# Altium PCB PCB.PcbDoc
Units mm, origin at the board's own origin, x right, y up, seen from the top; angles counter-clockwise.
Board outline 10.67 x 10.41 mm, 2 copper layers (Top Layer, Bottom Layer); 22 components, 8 nets, 48 pads, 0 vias.
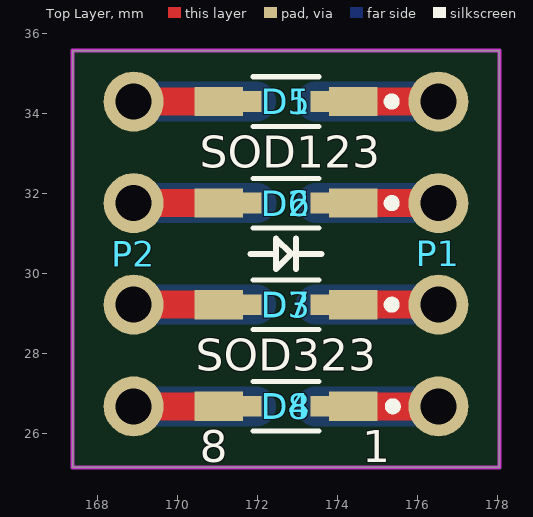
[diagram p0: Top Layer view]
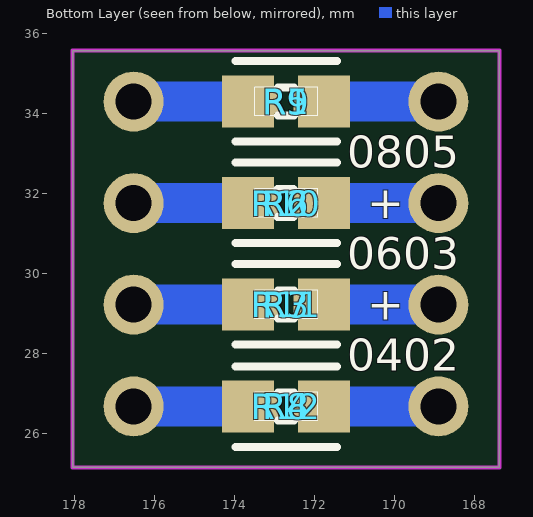
[diagram p1: Bottom Layer view, seen from below]

## Layer stack, top to bottom
Top Solder: solder mask 0.0102, Solder Resist, Dk 3.5
Top Layer: signal copper 0.0356
Dielectric 1: dielectric 0.32, FR-4, Dk 4.8
Bottom Layer: signal copper 0.0356
Bottom Solder: solder mask 0.0102, Solder Resist, Dk 3.5

## Board outline
167.386,35.56 178.054,35.56 178.054,25.146 167.386,25.146

## Design rules (kind name [scope] priority, off if disabled: settings)
Clearance [All] p1: gap=0.152 ignorepadtopadclearanceinfootprint=FALSE except(0: Arc-Hole Track-Hole SMDPad-Hole THPad-Hole Via-Hole Fill-Hole Poly-Hole Region-Hole Text-Hole)
HoleSize [All] p1: absolutevalues=TRUE maxlimit=6.2 minlimit=0.3 maxpercent=80.000 minpercent=20.000
MinimumSolderMaskSliver [All] p1: minsoldermaskwidth=0.1
PolygonConnect ViaConnect [IsVia] p1: connectstyle=Direct reliefconductorwidth=0.254 reliefentries=4 polygonreliefangle="90 Angle" airgapwidth=0.254
PolygonConnect [All] p2: connectstyle=Relief reliefconductorwidth=0.254 reliefentries=4 polygonreliefangle="90 Angle" airgapwidth=0.254
RoutingVias [All] p1: holewidth=0.3 width=0.6 viastyle="Through Hole" minholewidth=0.3 minwidth=0.5 maxholewidth=1 maxwidth=5
SilkToSilkClearance [All] p1: silktosilkclearance=0.1
SilkToSolderMaskClearance [IsPad] p1: minsilkscreentomaskgap=0.1 clearancetoexposedcopper=TRUE
SolderMaskExpansion [All] p1: expansion=0.051 istentingtop=FALSE
Width [All] p1: maxlimit=25.4 minlimit=0.15 preferedwidth=0.3
26 further rules are at their usual default settings.

## Components (designator, comment, footprint, x,y, rotation, side; value= is the part's Value field where it differs from the comment)
D1 "1N5819HW-7-F" SOD3715X145N 172.72,34.29 r180 top
D2 "1N5819HW-7-F" SOD3715X145N 172.72,31.75 r180 top
D3 "1N5819HW-7-F" SOD3715X145N 172.72,29.21 r180 top
D4 "1N5819HW-7-F" SOD3715X145N 172.72,26.67 r180 top
D5 "ZMV829BTA" SOD2512X116N 172.72,34.29 r180 top
D6 "ZMV829BTA" SOD2512X116N 172.72,31.75 r180 top
D7 "ZMV829BTA" SOD2512X116N 172.72,29.21 r180 top
D8 "ZMV829BTA" SOD2512X116N 172.72,26.67 r180 top
P1 "Header 4" HDR1X4 176.53,26.67 r90 top
P2 "Header 4" HDR1X4 168.91,34.29 r270 top
R1 "" 0805 172.72,34.29 r0 bottom
R2 "" 0805 172.72,31.75 r0 bottom
R3 "" 0805 172.72,29.21 r0 bottom
R4 "" 0805 172.72,26.67 r0 bottom
R5 "" J1-0603 172.72,34.29 r0 bottom
R6 "" J1-0603 172.732,31.75 r0 bottom
R7 "" J1-0603 172.72,29.21 r0 bottom
R8 "" J1-0603 172.72,26.67 r0 bottom
R9 "" "RES 0402" 172.72,34.29 r0 bottom
R10 "" "RES 0402" 172.72,31.75 r0 bottom
R11 "" "RES 0402" 172.72,29.21 r0 bottom
R12 "" "RES 0402" 172.72,26.67 r0 bottom

## Footprints (in the part's own frame and the unit in brackets; to place one, negate y for a bottom-side part, rotate by r counter-clockwise, add the part's x,y. Pads: shape width x height; smd on the part's side, far side on the other; paste and mask are expansions set on the pad)
0805 [mm]
  rect 1.3x1.3 smd: 1(-0.95,0) 2(0.95,0)
  silkscreen extent -1.27,-1.02 1.27,1, body extent -1.1,-0.72 1.1,0.73, height 1.1
HDR1X4 [mm] "Connector; Header; 4 Position"
  round 1.5 hole 0.9: 1(0,0) 2(2.54,0) 3(5.08,0) 4(7.62,0)
J1-0603 [mm] "Chip Resistor, Body 1.6x0.8mm, IPC High Density"
  rect 0.7x0.9 smd: 1(-0.75,0) 2(0.75,0)
  silkscreen extent -0.2,-0.35 0.2,0.35, body extent -0.85,-0.48 0.85,0.48, height 0.9
"RES 0402" [mil]
  rect 21.87x24 smd paste+0 mask+0: 1(-18.44,0) 2(18.44,0)
  silkscreen extent -31,-14 31,14, body extent -21,-10 21,10, height 28
SOD2512X116N [mm]
  rect 1.11x0.52 smd: A(1.165,0) K(-1.165,0)
  silkscreen extent -2.74,-0.62 0.82,0.62
SOD3715X145N [mm]
  rect 1.21x0.73 smd: A(1.68,0) C(-1.68,0)
  body extent -1.83,-0.78 1.82,0.77, height 1.5

## Part data
D1 D2 D3 D4: "Diode Schottky 40 V 1A Surface Mount SOD-123", Package="SOD-123 Fairchild Semiconductor", Availability="In Stock", Check_prices=https://www.snapeda.com/parts/1N5819HW-7-F/Diodes+Inc./view-part/?ref=eda, MF="Diodes Inc.", MP=1N5819HW-7-F, Price=None, Purchase-URL=https://pricing.snapeda.com/search/part/1N5819HW-7-F/?ref=eda, SnapEDA_Link=https://www.snapeda.com/parts/1N5819HW-7-F/Diodes+Inc./view-part/?ref=snap
D5 D6 D7 D8: "Varactors Single 25 V Surface Mount SOD-323", Package="SOD-323 Diodes Inc.", Availability="In Stock", Check_prices=https://www.snapeda.com/parts/ZMV829BTA/Diodes+Inc./view-part/?ref=eda, MF="Diodes Inc.", MP=ZMV829BTA, Price=None, Purchase-URL=https://pricing.snapeda.com/search/part/ZMV829BTA/?ref=eda, SnapEDA_Link=https://www.snapeda.com/parts/ZMV829BTA/Diodes+Inc./view-part/?ref=snap
P1 P2: "Header, 4-Pin", LatestRevisionDate=17-Jul-2002, LatestRevisionNote="Re-released for DXP Platform.", Publisher="Altium Limited"
R1 R2 R3 R4 R5 R6 R7 R8: library part "Res 0402", "Resistor"
R9 R10 R11 R12: library part "Res 0805", "Resistor"

## Nets (pads, with @x,y where several pads share a name; then routed paths per layer and width w, separated by ;. In a path a pad name is that pad's centre, name@x,y a point inside that pad or via, vN(x,y) a via of type N, cw(c..) or ccw(c..) an arc to the next point about the centre after c; other vN are vias at no path point)
1: D4.C D8.K P1.1 R4.2 R8.2 R12.2 | length 5.2
  Top Layer w0.7: D4.C P1.1
  Bottom Layer w1: R8.2 R4.2 P1.1
2: D3.C D7.K P1.2 R3.2 R7.2 R11.2 | length 5.2
  Top Layer w0.7: D3.C P1.2
  Bottom Layer w1: R7.2 R3.2 P1.2
3: D2.C D6.K P1.3 R2.2 R6.2 R10.2 | length 5.2
  Top Layer w0.7: D2.C P1.3
  Bottom Layer w1: R6.2 R2.2 P1.3
4: D1.C D5.K P1.4 R1.2 R5.2 R9.2 | length 5.2
  Top Layer w0.7: D1.C P1.4
  Bottom Layer w1: R5.2 R1.2 P1.4
5: D1.A D5.A P2.1 R1.1 R5.1 R9.1 | length 5.2
  Top Layer w0.7: P2.1 D1.A
  Bottom Layer w1: P2.1 R1.1 R5.1
6: D2.A D6.A P2.2 R2.1 R6.1 R10.1 | length 5.2
  Top Layer w0.4: P2.2 P2.2@168.914,31.746
  Top Layer w0.7: P2.2 D2.A
  Bottom Layer w1: P2.2 R2.1 R6.1
7: D3.A D7.A P2.3 R3.1 R7.1 R11.1 | length 5.2
  Top Layer w0.7: P2.3 D3.A
  Bottom Layer w1: P2.3 R3.1 R7.1
8: D4.A D8.A P2.4 R4.1 R8.1 R12.1 | length 5.2
  Top Layer w0.7: P2.4 D4.A
  Bottom Layer w1: P2.4 R4.1 R8.1

## Keep-outs
Keep-Out Layer:
  the board outline again, w0.1

## Silkscreen, mask and mechanical layers (free items; w line width, h text height)
Top Overlay:
  lines w0.15: 171.831,30.48 172.466,30.48 ; 172.974,30.48 173.609,30.48 ; 172.974,30.099 172.974,30.861 ; 172.974,30.099 172.974,30.861 ; 172.974,30.099 172.974,30.861 ; 172.466,30.099 172.466,30.861 172.847,30.48 172.466,30.099
  text "SOD123" at 170.561,32.639 h0.8
  text "SOD323" at 170.461,27.559 h0.8
  text "8" at 170.561,25.273 h0.8
  text "1" at 174.625,25.273 h0.8
Bottom Overlay:
  text "0805" at 171.196,32.639 h0.8
  text "+" at 170.688,31.369 h0.8
  text "0603" at 171.196,30.099 h0.8
  text "+" at 170.688,28.829 h0.8
  text "0402" at 171.196,27.559 h0.8